# EAGLE board Teensy_v1 (EAGLE 7.7.0)

Size 77.14 x 64.76 mm. Coordinates in mm from the lower left corner, seen from the top.
Outline: 0,0 77.14,0 77.14,64.76 0,64.76 0,0
Copper layers (1*16): Top 0.035mm / dielectric 1.6mm / Bottom 0.035mm
Design rules "Elecrow_2-layer": minimum track width 6mil, minimum drill 12mil, track to track 6mil, track to pad 6mil, pad to pad 6mil, via to via 8mil, smd to smd 0mil, copper to edge 20mil, drill to drill 10mil, minimum pad ring 6mil, minimum via ring 6mil, stop-mask expansion 0mil, vias tented up to drill 100mil, thermal gap 10mil
Net classes: 0 default: width 0.508 mm

## Footprints (pad centres in the part's own frame; a part is rotated, then mirrored left to right if it is on the bottom)
C025-025X050 = drill 0.813 octagon: 1 -1.27,0; 2 1.27,0
E2-5 = drill 0.813 pad 1.27: + -1.016,0 | drill 0.813 pad 1.27 octagon: - 1.016,0
E5-10,5 = drill 1.016 pad 2.54: + -2.54,0 | drill 1.016 pad 2.54 octagon: - 2.54,0
DIL08 = drill 0.813 pad 1.27: 1 -3.81,-3.81; 2 -1.27,-3.81; 3 1.27,-3.81; 4 3.81,-3.81; 5 3.81,3.81; 6 1.27,3.81; 7 -1.27,3.81; 8 -3.81,3.81
MSOP8 = smd 0.4 x 1.2: 1 -0.975,-2.05; 2 -0.325,-2.05; 3 0.325,-2.05; 4 0.975,-2.05; 5 0.975,2.05; 6 0.325,2.05; 7 -0.325,2.05; 8 -0.975,2.05
SOCKET-16 = drill 0.813 long: 1 -8.89,-3.81; 2 -6.35,-3.81; 3 -3.81,-3.81; 4 -1.27,-3.81; 5 1.27,-3.81; 6 3.81,-3.81; 7 6.35,-3.81; 8 8.89,-3.81; 9 8.89,3.81; 10 6.35,3.81; 11 3.81,3.81; 12 1.27,3.81; 13 -1.27,3.81; 14 -3.81,3.81; 15 -6.35,3.81; 16 -8.89,3.81
DIL24-6 = drill 0.813 long: 1 -13.97,-7.62; 2 -11.43,-7.62; 3 -8.89,-7.62; 4 -6.35,-7.62; 5 -3.81,-7.62; 6 -1.27,-7.62; 7 1.27,-7.62; 8 3.81,-7.62; 9 6.35,-7.62; 10 8.89,-7.62; 11 11.43,-7.62; 12 13.97,-7.62; 13 13.97,7.62; 14 11.43,7.62; 15 8.89,7.62; 16 6.35,7.62; 17 3.81,7.62; 18 1.27,7.62; 19 -1.27,7.62; 20 -3.81,7.62; 21 -6.35,7.62; 22 -8.89,7.62; 23 -11.43,7.62; 24 -13.97,7.62
1X04 = drill 1.016 pad 1.88: 1 0,0; 2 2.54,0; 3 5.08,0; 4 7.62,0
SJ1-3533NG = drill 1.5 pad 2.54 octagon: 1 0,-0.9; 2 2.4,1.1; 3 7.9,1.1
0204/7 = drill 0.813 octagon: 1 -3.81,0; 2 3.81,0
MA03-2 = drill 1.016: 1 -2.54,-1.27 | drill 1.016 octagon: 2 -2.54,1.27; 3 0,-1.27; 4 0,1.27; 5 2.54,-1.27; 6 2.54,1.27
TEENSY_3.5_ALL_PINS&PADS = drill 0.965: 0 -7.62,13.97; 1 -7.62,11.43; 2 -7.62,8.89; 3 -7.62,6.35; 3.3V 7.62,11.43; 3.3V2 2.54,-41.91; 3.3V3 -7.62,-19.05; 3.3V4 -2.54,-29.21; 4 -7.62,3.81; 5 -7.62,1.27; 6 -7.62,-1.27; 7 -7.62,-3.81; 8 -7.62,-6.35; 9 -7.62,-8.89; 10 -7.62,-11.43; 11 -7.62,-13.97; 12 -7.62,-16.51; 13 7.62,-16.51; 14/A0 7.62,-13.97; 15/A1 7.62,-11.43; 16/A2 7.62,-8.89; 17/A3 7.62,-6.35; 18/A4 7.62,-3.81; 19/A5 7.62,-1.27; 20/A6 7.62,1.27; 21/A7 7.62,3.81; 22/A8 7.62,6.35; 23/A9 7.62,8.89; 24 -7.62,-21.59; 25 -7.62,-24.13; 26 -7.62,-26.67; 27 -7.62,-29.21; 28 -7.62,-31.75; 29 -7.62,-34.29; 30 -7.62,-36.83; 31/A12 -7.62,-39.37; 32/A13 -7.62,-41.91; 33/A14 7.62,-41.91; 34/A15 7.62,-39.37; 35/A16 7.62,-36.83; 36/A17 7.62,-34.29; 37/A18 7.62,-31.75; 38/A19 7.62,-29.21; 39/A20 7.62,-26.67; 40 0,-21.59; 41 0,-24.13; 42 0,-26.67; 43 0,-31.75; 44 0,-34.29; 45 0,-36.83; 46 0,-39.37; 47 2.54,-39.37; 48 2.54,-36.83; 49 2.54,-34.29; 50 2.54,-31.75; 51 2.54,-26.67; 52 2.54,-24.13; 53 2.54,-21.59; 54 2.54,-6.35; 55 2.54,-3.81; 56 2.54,-1.27; 57 2.54,1.27; A10 5.08,6.35; A11 5.08,3.81; A21 7.62,-24.13; A22 7.62,-21.59; A25 -4.445,5.08; A26 -4.445,7.62; AGND 7.62,13.97; AREF 5.08,8.89; DC 0,-3.81; DE 0,-1.27; DO 0,-6.35; GND -7.62,16.51; GND1 7.62,-19.05; GND2 0,1.27; GND3 -4.445,2.54; GND4 -4.445,0; GND5 0,-41.91; GND6 0,-29.21; NC -4.445,10.16; PGM 2.54,-29.21; RESET 5.08,-29.21; VBAT -5.08,-29.21; VIN 7.62,16.51; VUSB 5.08,13.97

## Placement (x,y rotation side)
C1  10nF  [C025-025X050]  31.11,47.62 90 top
C2  1uF  [E2-5]  26.67,46.99 0 top
C3  10nF  [C025-025X050]  28.57,27.94 90 top
C4  1uF  [E2-5]  33.02,27.94 0 top
C5  1000uF  [E5-10,5]  27.94,39.37 0 top
C6  1000uF  [E5-10,5]  69.85,36.83 0 top
C7  1000uF  [E5-10,5]  69.85,26.67 0 top
C8  100uF  [E2-5]  66.04,44.45 0 top
C9  100uF  [E2-5]  66.04,49.53 0 top
C10  100uF  [E2-5]  66.04,19.05 0 top
C11  100uF  [E2-5]  66.04,13.97 0 top
C12  16uF  [E5-10,5]  58.42,46.99 0 top
C13  16uF  [E5-10,5]  58.42,16.51 0 top
C14  1uF  [E2-5]  39.37,45.09 0 top
C15  10uF  [E2-5]  41.27,29.21 90 top
C16  10uF  [E2-5]  46.99,29.21 90 top
C17  4.7nF  [C025-025X050]  48.26,53.98 0 top
C18  4.7nF  [C025-025X050]  48.26,50.16 0 top
C19  47nF  [C025-025X050]  72.39,46.99 270 top
C20  47nF  [C025-025X050]  72.39,16.51 270 top
C21  220pF  [C025-025X050]  41.91,49.53 180 top
IC1  LM386N-1  [DIL08]  58.42,36.83 180 top
IC2  LM386N-1  [DIL08]  58.42,26.67 180 top
IC3  LTC6903CMS8  [MSOP8]  34.92,48.26 0 top
IC4  LTC6903CMS8  [MSOP8]  24.77,27.3 180 top
IC5  [SOCKET-16]  31.75,57.15 180 top
IC6  [DIL24-6]  36.83,15.24 0 top
J1  [1X04]  22.86,3.81 0 top
J2  SJ1-3533NG  [SJ1-3533NG]  74.93,57.78 180 top
R1  11k  [0204/7]  49.53,58.42 0 top
R2  10k  [0204/7]  49.53,60.96 0 top
R3  11k  [0204/7]  48.26,45.72 0 top
R4  10k  [0204/7]  48.26,43.18 180 top
R5  10  [0204/7]  69.85,46.99 90 top
R6  10  [0204/7]  69.85,16.51 90 top
R7  51k  [0204/7]  38.1,40.64 0 top
R8  51k  [0204/7]  38.1,38.1 0 top
R9  2.2k  [0204/7]  48.26,40.64 180 top
R10  2.2k  [0204/7]  48.26,38.1 0 top
R11  2.2k  [0204/7]  37.47,29.21 270 top
R12  2.2k  [0204/7]  50.8,29.21 270 top
R13  2.2k  [0204/7]  43.81,57.15 90 top
SV1  [MA03-2]  7.62,-55.88 0 top  (outside the outline)
U$1  TEENSY_3.5_ALL_PINS&PADS  [TEENSY_3.5_ALL_PINS&PADS]  11.43,19.05 180 top

## Library data of the parts
C1-C21 R1-R13 = resistor
IC1 IC2 = linear
IC3 IC4 = linear-technology-3
IC5 IC6 = Sega
J1 = SparkFun-Connectors
J2 = SJ1-3533NG; AVAILABILITY: Good; DESCRIPTION: SJ1 Series 3.5 mm 12 V Right Angle Through Hole Isolated Stereo Audio Jack; MF: CUI; MP: SJ1-3533NG; PACKAGE: None; PRICE: 0.77 USD
SV1 = con-lstb; OC_FARNELL: unknown; OC_NEWARK: unknown
U$1 = Teensy_3_and_LC_Series_Boards_v1.4

## Nets
5V: C1.1 C2.+ C3.1 C4.+ C5.+ IC3.7 IC4.7 IC5.16 IC6.22 IC6.23 U$1.57
9V: C9.+ C10.+ IC1.6 IC2.6
AGND: U$1.AGND
AREF: U$1.AREF
GND: C1.2 C2.- C3.2 C4.- C5.- C8.- C9.- C10.- C11.- C21.1 IC1.2 IC1.4 IC2.2 IC2.4 IC3.1 IC4.1 IC5.6 IC5.8 IC6.1 IC6.19 J1.1 J2.1 R5.1 R6.1 R11.1 R12.1 R13.1 SV1.1 SV1.3 SV1.5 U$1.GND U$1.GND1 U$1.GND2 U$1.GND3 U$1.GND4 U$1.GND5 U$1.GND6
I2C_SCL: J1.3 U$1.19/A5
I2C_SDA: J1.4 U$1.18/A4
N$1: J1.2 U$1.3.3V U$1.3.3V2 U$1.3.3V3 U$1.3.3V4
N$2: IC4.6 IC6.24
N$3: C12.+ R1.2
N$4: C7.- J2.3
N$5: C6.- J2.2
N$6: C6.+ C19.2 IC1.5
N$7: C7.+ C20.2 IC2.5
N$8: C8.+ IC1.7
N$9: C11.+ IC2.7
N$10: C13.+ R3.2
N$11: IC3.6 IC5.14
N$12: C19.1 R5.2
N$13: C17.2 R1.1 R2.2
N$14: C18.2 R3.1 R4.2
N$15: C12.- IC1.3
N$16: C13.- IC2.3
N$17: C20.1 R6.2
N$19: C17.1 R2.1 R7.2 R9.2
N$21: C18.1 R4.1 R8.2 R10.2
N$22: C14.- R7.1 R8.1
N$23: C15.- R9.1
N$24: C16.- R10.1
NEXT_BUTTON: U$1.23/A9
PREV_BUTTON: U$1.21/A7
RAND_BUTTON: U$1.22/A8
SN_CLOCK_CS: IC3.4 U$1.32/A13
SN_D0: IC5.10 U$1.24
SN_D1: IC5.11 U$1.25
SN_D2: IC5.12 U$1.26
SN_D3: IC5.13 U$1.27
SN_D4: IC5.15 U$1.28
SN_D5: IC5.1 U$1.29
SN_D6: IC5.2 U$1.30
SN_D7: IC5.3 U$1.31/A12
SN_OUT: C14.+ C21.2 IC5.7 R13.2
SN_WE: IC5.5 U$1.39/A20
SPI_SCK: IC3.3 IC4.3 U$1.13
SPI_SDI: IC3.2 IC4.2 U$1.11
VBAT: U$1.VBAT
VCC: IC3.8 IC4.8
VIN: U$1.VIN
VUSB: U$1.VUSB
YM_A0: IC6.17 U$1.34/A15
YM_A1: IC6.18 U$1.33/A14
YM_CLOCK_CS: IC4.4 U$1.14/A0
YM_CS: IC6.14 U$1.37/A18
YM_D0: IC6.2 U$1.0
YM_D1: IC6.3 U$1.1
YM_D2: IC6.4 U$1.2
YM_D3: IC6.5 U$1.3
YM_D4: IC6.6 U$1.4
YM_D5: IC6.7 U$1.5
YM_D6: IC6.8 U$1.6
YM_D7: IC6.9 U$1.7
YM_IC: IC6.11 U$1.38/A19
YM_MOL: C16.+ IC6.21 R12.2
YM_MOR: C15.+ IC6.20 R11.2
YM_RD: IC6.16 U$1.35/A16
YM_WR: IC6.15 U$1.36/A17

## Tracks (layer width: path | path; a pad name or v marks a point on that pad's centre or on a via)
5V  (10 unrouted)
9V  (3 unrouted)
GND  (36 unrouted)
I2C_SCL  (1 unrouted)
I2C_SDA  (1 unrouted)
N$1  (4 unrouted)
N$2  (1 unrouted)
N$3  (1 unrouted)
N$4  (1 unrouted)
N$5  (1 unrouted)
N$6  (2 unrouted)
N$7  (2 unrouted)
N$8  (1 unrouted)
N$9  (1 unrouted)
N$10  (1 unrouted)
N$11  (1 unrouted)
N$12  (1 unrouted)
N$13  (2 unrouted)
N$14  (2 unrouted)
N$15  (1 unrouted)
N$16  (1 unrouted)
N$17  (1 unrouted)
N$19  (3 unrouted)
N$21  (3 unrouted)
N$22  (2 unrouted)
N$23  (1 unrouted)
N$24  (1 unrouted)
SN_CLOCK_CS  (1 unrouted)
SN_D0  (1 unrouted)
SN_D1  (1 unrouted)
SN_D2  (1 unrouted)
SN_D3  (1 unrouted)
SN_D4  (1 unrouted)
SN_D5  (1 unrouted)
SN_D6  (1 unrouted)
SN_D7  (1 unrouted)
SN_OUT  (3 unrouted)
SN_WE  (1 unrouted)
SPI_SCK  (2 unrouted)
SPI_SDI  (2 unrouted)
VCC  (1 unrouted)
YM_A0  (1 unrouted)
YM_A1  (1 unrouted)
YM_CLOCK_CS  (1 unrouted)
YM_CS  (1 unrouted)
YM_D0  (1 unrouted)
YM_D1  (1 unrouted)
YM_D2  (1 unrouted)
YM_D3  (1 unrouted)
YM_D4  (1 unrouted)
YM_D5  (1 unrouted)
YM_D6  (1 unrouted)
YM_D7  (1 unrouted)
YM_IC  (1 unrouted)
YM_MOL  (2 unrouted)
YM_MOR  (2 unrouted)
YM_RD  (1 unrouted)
YM_WR  (1 unrouted)